# Altium PCB lm3886 Audio Amplifier.PcbDoc
Units mil, origin at the board's own origin, x right, y up, seen from the top; angles counter-clockwise.
Board outline 4448.92 x 2595 mil, 2 copper layers (Top Layer, Bottom Layer); 125 components, 45 nets, 248 pads, 0 vias.
Unrouted connection lines stored in the file: 157.
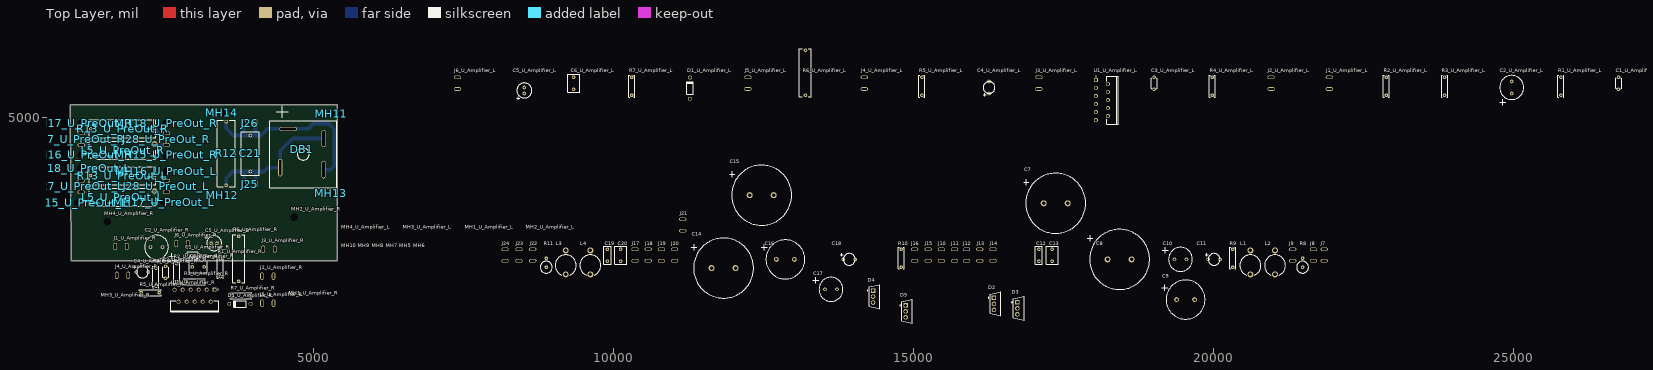
[diagram p0: Top Layer view]
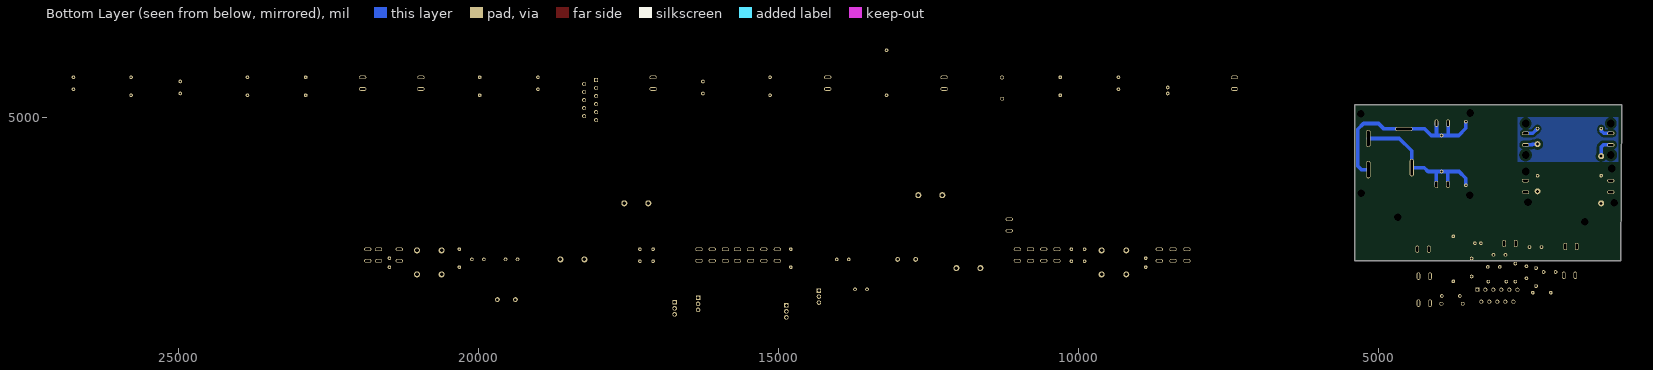
[diagram p1: Bottom Layer view, seen from below]

## Layer stack, top to bottom
Top Solder: solder mask 0.4, Solder Resist, Dk 3.5
Top Layer: signal copper 1.4
Dielectric 1: dielectric 12.6, FR-4, Dk 4.8
Bottom Layer: signal copper 1.4
Bottom Solder: solder mask 0.4, Solder Resist, Dk 3.5

## Board outline
946.08,5210 5395,5210 5395,2615 962.5,2615

## Design rules (kind name [scope] priority, off if disabled: settings)
Clearance [All] p1: gap=40 ignorepadtopadclearanceinfootprint=FALSE except(20: THPad-THPad THPad-Hole)
Height [All] p1: minheight=0 maxheight=10000 prefheight=500
PolygonConnect [All] p1: connectstyle=Relief reliefconductorwidth=10 reliefentries=4 polygonreliefangle="90 Angle" airgapwidth=10
RoutingVias [All] p1: holewidth=28 width=50 viastyle="Through Hole" minholewidth=28 minwidth=50 maxholewidth=28 maxwidth=50
SolderMaskExpansion [All] p1: expansion=4 istentingtop=FALSE
Width [All] p1: maxlimit=100 minlimit=10 preferedwidth=10
29 further rules are at their usual default settings.

## Classes and differential pairs
channel class PreOut: U_PreOut_L U_PreOut_R
channel class Amplifier: U_Amplifier_L U_Amplifier_R
component class U_Supply: C7 C8 C9 C10 C11 C12 C13 C14 C15 C16 C17 C18 C19 C20 D2 D3 D4 D5 J7 J8 J9 J10 J11 J12 J13 J14 J15 J16 J17 J18 J19 J20 J21 J22 J23 J24 L1 L2 L3 L4 MH5 MH6 MH7 MH8 MH9 MH10 R8 R9 R10 R11
component class U_PreOut_R: J27_U_PreOut_R J28_U_PreOut_R L5_U_PreOut_R MH15_U_PreOut_R MH16_U_PreOut_R MH17_U_PreOut_R MH18_U_PreOut_R R13_U_PreOut_R
component class U_PreOut_L: J27_U_PreOut_L J28_U_PreOut_L L5_U_PreOut_L MH15_U_PreOut_L MH17_U_PreOut_L MH18_U_PreOut_L R13_U_PreOut_L
component class "U_GND Loop": C21 DB1 J25 J26 MH11 MH12 MH14 R12
component class U_Amplifier_R: C1_U_Amplifier_R C2_U_Amplifier_R C3_U_Amplifier_R C4_U_Amplifier_R C5_U_Amplifier_R C6_U_Amplifier_R D1_U_Amplifier_R J1_U_Amplifier_R J2_U_Amplifier_R J3_U_Amplifier_R J4_U_Amplifier_R J5_U_Amplifier_R J6_U_Amplifier_R MH1_U_Amplifier_R MH2_U_Amplifier_R MH3_U_Amplifier_R MH4_U_Amplifier_R R1_U_Amplifier_R R2_U_Amplifier_R R3_U_Amplifier_R R4_U_Amplifier_R R5_U_Amplifier_R R6_U_Amplifier_R R7_U_Amplifier_R U1_U_Amplifier_R
component class U_Amplifier_L: C1_U_Amplifier_L C2_U_Amplifier_L C3_U_Amplifier_L C4_U_Amplifier_L C5_U_Amplifier_L C6_U_Amplifier_L D1_U_Amplifier_L J1_U_Amplifier_L J2_U_Amplifier_L J3_U_Amplifier_L J4_U_Amplifier_L J5_U_Amplifier_L J6_U_Amplifier_L MH1_U_Amplifier_L MH2_U_Amplifier_L MH3_U_Amplifier_L MH4_U_Amplifier_L R1_U_Amplifier_L R2_U_Amplifier_L R3_U_Amplifier_L R4_U_Amplifier_L R5_U_Amplifier_L R6_U_Amplifier_L R7_U_Amplifier_L U1_U_Amplifier_L

## Components (designator, comment, footprint, x,y, rotation, side; value= is the part's Value field where it differs from the comment)
C1_U_Amplifier_L "47pF" "CAPACITOR P5 2.4X4.4MM" 26745,5470 r90 top (schematic designator C1)
C1_U_Amplifier_R "47pF" "CAPACITOR P5 2.4X4.4MM" 2880,2710 r0 top (schematic designator C1)
C2_U_Amplifier_L "470uF" "CAPACITOR ELECTROLYTIC 10X16MM" 24965,5400 r90 top (schematic designator C2)
C2_U_Amplifier_R "470uF" "CAPACITOR ELECTROLYTIC 10X16MM" 2480,2840 r180 top (schematic designator C2)
C3_U_Amplifier_L "680pF" "CAPACITOR P5 2.4X4.4MM" 19005,5470 r90 top (schematic designator C3)
C3_U_Amplifier_R "680pF" "CAPACITOR P5 2.4X4.4MM" 2530,2320 r90 top (schematic designator C3)
C4_U_Amplifier_L "4.7uF" "CAPACITOR ELECTROLYTIC 5X11MM" 16255,5400 r90 top (schematic designator C4)
C4_U_Amplifier_R "4.7uF" "CAPACITOR ELECTROLYTIC 5X11MM" 2045,2425 r0 top (schematic designator C4)
C5_U_Amplifier_L "100uF" "CAPACITOR ELECTROLYTIC 6X11MM" 8510,5400 r90 top (schematic designator C5)
C5_U_Amplifier_R "100uF" "CAPACITOR ELECTROLYTIC 6X11MM" 3290,2905 r0 top (schematic designator C5)
C6_U_Amplifier_L "220nF" "CAPACITOR P5 5X7.5MM" 9330,5470 r90 top (schematic designator C6)
C6_U_Amplifier_R "220nF" "CAPACITOR P5 5X7.5MM" 2975,2510 r0 top (schematic designator C6)
C7 "4700uF" "CAPACITOR ELECTROLYTIC 25X41MM" 17165,3570 r0 top
C8 "4700uF" "CAPACITOR ELECTROLYTIC 25X41MM" 18230,2635 r0 top
C9 "3300uF" "CAPACITOR ELECTROLYTIC 16X21MM" 19380,1965 r0 top
C10 "470uF" "CAPACITOR ELECTROLYTIC 10X16MM" 19345,2635 r0 top
C11 "22uF" "CAPACITOR ELECTROLYTIC 5X11MM" 19905,2635 r0 top
C12 "100nF" "CAPACITOR P5 3X7.5MM" 17085,2605 r90 top
C13 "100nF" "CAPACITOR P5 5X7.5MM" 17305,2605 r90 top
C14 "4700uF" "CAPACITOR ELECTROLYTIC 25X41MM" 11630,2490 r0 top
C15 "4700uF" "CAPACITOR ELECTROLYTIC 25X41MM" 12265,3705 r0 top
C16 "3300uF" "CAPACITOR ELECTROLYTIC 16X21MM" 12710,2635 r0 top
C17 "470uF" "CAPACITOR ELECTROLYTIC 10X16MM" 13520,2135 r0 top
C18 "22uF" "CAPACITOR ELECTROLYTIC 5X11MM" 13825,2635 r0 top
C19 "100nF" "CAPACITOR P5 3X7.5MM" 9895,2605 r90 top
C20 "100nF" "CAPACITOR P5 5X7.5MM" 10115,2605 r90 top
C21 "100nF" "CAPACITOR P15 7.2X18.3MM" 3945,4100 r90 top
D1_U_Amplifier_L "1N4745A" FAIR-DO-41-2_V 11270,5490 r90 top (schematic designator D1)
D1_U_Amplifier_R "1N4745A" FAIR-DO-41-2_V 3770,1895 r180 top (schematic designator D1)
D2 "MBR20100CT-E3/4W" FP-MBR20100CT-E3-4W-MFG 16360,1895 r0 top
D3 "MBR20100CT-E3/4W" FP-MBR20100CT-E3-4W-MFG 16750,1820 r0 top
D4 "MBR20100CT-E3/4W" FP-MBR20100CT-E3-4W-MFG 14345,2015 r0 top
D5 "MBR20100CT-E3/4W" FP-MBR20100CT-E3-4W-MFG 14889.02,1769.61 r0 top
DB1 "Diode Rectifier" "KBPC RECTIFIER" 4825,4390 r0 top
J1_U_Amplifier_L "GND_SIG" "TERMINAL 6.3MM MALE" 21925,5475 r90 top (schematic designator J1)
J1_U_Amplifier_R "GND_SIG" "TERMINAL 6.3MM MALE" 1885,2850 r180 top (schematic designator J1)
J2_U_Amplifier_L "V+" "TERMINAL 6.3MM MALE" 20955,5475 r90 top (schematic designator J2)
J2_U_Amplifier_R "V+" "TERMINAL 6.3MM MALE" 4330,2355 r180 top (schematic designator J2)
J3_U_Amplifier_L "V+" "TERMINAL 6.3MM MALE" 17085,5475 r90 top (schematic designator J3)
J3_U_Amplifier_R "V+" "TERMINAL 6.3MM MALE" 4350,2805 r180 top (schematic designator J3)
J4_U_Amplifier_L "Input" "TERMINAL 6.3MM MALE" 14175,5475 r90 top (schematic designator J4)
J4_U_Amplifier_R "Input" "TERMINAL 6.3MM MALE" 1907.91,2370 r180 top (schematic designator J4)
J5_U_Amplifier_L "V-" "TERMINAL 6.3MM MALE" 12235,5475 r90 top (schematic designator J5)
J5_U_Amplifier_R "V-" "TERMINAL 6.3MM MALE" 4137.09,1905 r0 top (schematic designator J5)
J6_U_Amplifier_L "GND_PWR" "TERMINAL 6.3MM MALE" 7395,5475 r90 top (schematic designator J6)
J6_U_Amplifier_R "GND_PWR" "TERMINAL 6.3MM MALE" 2902.91,2900 r180 top (schematic designator J6)
J7 "V+" "TERMINAL 6.3MM MALE" 21840,2610 r90 top
J8 "V+" "TERMINAL 6.3MM MALE" 21660,2610 r90 top
J9 "6.3mm Male Terminal" "TERMINAL 6.3MM MALE" 21315,2610 r90 top
J10 "GND" "TERMINAL 6.3MM MALE" 15460,2610 r90 top
J11 "GND" "TERMINAL 6.3MM MALE" 15680,2610 r90 top
J12 "GND" "TERMINAL 6.3MM MALE" 15880,2610 r90 top
J13 "GND" "TERMINAL 6.3MM MALE" 16100,2610 r90 top
J14 "GND" "TERMINAL 6.3MM MALE" 16320,2610 r90 top
J15 "GND" "TERMINAL 6.3MM MALE" 15240,2610 r90 top
J16 "GND" "TERMINAL 6.3MM MALE" 15015,2610 r90 top
J17 "GND" "TERMINAL 6.3MM MALE" 10355,2610 r90 top
J18 "GND" "TERMINAL 6.3MM MALE" 10575,2610 r90 top
J19 "GND" "TERMINAL 6.3MM MALE" 10795,2610 r90 top
J20 "GND" "TERMINAL 6.3MM MALE" 11015,2610 r90 top
J21 "GND" "TERMINAL 6.3MM MALE" 11150,3112.09 r90 top
J22 "6.3mm Male Terminal" "TERMINAL 6.3MM MALE" 8650,2610 r90 top
J23 "V-" "TERMINAL 6.3MM MALE" 8420,2610 r90 top
J24 "V-" "TERMINAL 6.3MM MALE" 8190,2610 r90 top
J25 "Earth" "TERMINAL 6.3MM MALE" 4032.91,3885 r180 top
J26 "GND" "TERMINAL 6.3MM MALE" 4030,4905 r180 top
J27_U_PreOut_L "OUT" "TERMINAL 6.3MM MALE" 1125,3755 r90 top (schematic designator J27)
J27_U_PreOut_R "OUT" "TERMINAL 6.3MM MALE" 1125,4542.09 r90 top (schematic designator J27)
J28_U_PreOut_L "IN" "TERMINAL 6.3MM MALE" 2545,3755 r90 top (schematic designator J28)
J28_U_PreOut_R "IN" "TERMINAL 6.3MM MALE" 2545,4542.09 r90 top (schematic designator J28)
L1 "Inductor P10" "INDUCTOR P10" 20610,2385 r90 top
L2 "Inductor P9" "INDUCTOR P10" 21020,2385 r90 top
L3 "Inductor P10" "INDUCTOR P10" 9200,2385 r90 top
L4 "Inductor P9" "INDUCTOR P10" 9610,2385 r90 top
L5_U_PreOut_L "Inductor" "INDUCTOR P26" 2345.63,3670 r180 top (schematic designator L5)
L5_U_PreOut_R "Inductor" "INDUCTOR P26" 2345.63,4455 r180 top (schematic designator L5)
MH1_U_Amplifier_L "Mounting Hole m3" "Mounting Hole" 7570,3035 r90 top (schematic designator MH1)
MH1_U_Amplifier_R "Mounting Hole m3" "Mounting Hole" 4640,1935 r90 top (schematic designator MH1)
MH2_U_Amplifier_L "Mounting Hole m3" "Mounting Hole" 8590,3035 r90 top (schematic designator MH2)
MH2_U_Amplifier_R "Mounting Hole m3" "Mounting Hole" 4675,3335 r90 top (schematic designator MH2)
MH3_U_Amplifier_L "Mounting Hole m3" "Mounting Hole" 6540,3035 r90 top (schematic designator MH3)
MH3_U_Amplifier_R "Mounting Hole m3" "Mounting Hole" 1505,1900 r90 top (schematic designator MH3)
MH4_U_Amplifier_L "Mounting Hole m3" "Mounting Hole" 5510,3035 r90 top (schematic designator MH4)
MH4_U_Amplifier_R "Mounting Hole m3" "Mounting Hole" 1560,3260 r90 top (schematic designator MH4)
MH5 "Mounting Hole m3" "Mounting Hole" 6480,2745 r0 top
MH6 "Mounting Hole m3" "Mounting Hole" 6715,2745 r0 top
MH7 "Mounting Hole m3" "Mounting Hole" 6250,2745 r0 top
MH8 "Mounting Hole m3" "Mounting Hole" 6020,2745 r0 top
MH9 "Mounting Hole m3" "Mounting Hole" 5790,2745 r0 top
MH10 "Mounting Hole m3" "Mounting Hole" 5510,2745 r90 top
MH11 "Mounting Hole m3" "MOUNTING HOLE" 5290,5060 r0 top
MH12 "Mounting Hole m3" "MOUNTING HOLE" 3475,3705 r0 top
MH13 "Mounting Hole m3" "MOUNTING HOLE" 5285,3735 r0 top
MH14 "Mounting Hole m3" "MOUNTING HOLE" 3465,5075 r0 top
MH15_U_PreOut_L "Mounting Hole m3" "MOUNTING HOLE" 1070,3580 r90 top (schematic designator MH15)
MH15_U_PreOut_R "Mounting Hole m3" "MOUNTING HOLE" 2545,4375 r90 top (schematic designator MH15)
MH16_U_PreOut_L "Mounting Hole m3" "MOUNTING HOLE" 2540,4100 r90 top (schematic designator MH16)
MH16_U_PreOut_R "Mounting Hole m3" "MOUNTING HOLE" 1125,4375 r90 top (schematic designator MH16)
MH17_U_PreOut_L "Mounting Hole m3" "MOUNTING HOLE" 2505,3585 r90 top (schematic designator MH17)
MH17_U_PreOut_R "Mounting Hole m3" "MOUNTING HOLE" 1125,4900 r90 top (schematic designator MH17)
MH18_U_PreOut_L "Mounting Hole m3" "MOUNTING HOLE" 1110,4150 r90 top (schematic designator MH18)
MH18_U_PreOut_R "Mounting Hole m3" "MOUNTING HOLE" 2545,4900 r90 top (schematic designator MH18)
R1_U_Amplifier_L "20k" "RESISTOR 0207 1/4W" 25785,5370 r90 top (schematic designator R1)
R1_U_Amplifier_R "20k" "RESISTOR 0207 1/4W" 3445,2650 r270 top (schematic designator R1)
R2_U_Amplifier_L "1k" "RESISTOR 0207 1/4W" 22875,5370 r90 top (schematic designator R2)
R2_U_Amplifier_R "1k" "RESISTOR 0207 1/4W" 2715,2565 r270 top (schematic designator R2)
R3_U_Amplifier_L "20k" "RESISTOR 0207 1/4W" 23845,5370 r90 top (schematic designator R3)
R3_U_Amplifier_R "20k" "RESISTOR 0207 1/4W" 2865,2265 r0 top (schematic designator R3)
R4_U_Amplifier_L "20k" "RESISTOR 0207 1/4W" 19975,5370 r90 top (schematic designator R4)
R4_U_Amplifier_R "20k" "RESISTOR 0207 1/4W" 2370,2190 r90 top (schematic designator R4)
R5_U_Amplifier_L "1k" "RESISTOR 0207 1/4W" 15135,5370 r90 top (schematic designator R5)
R5_U_Amplifier_R "1k" "RESISTOR 0207 1/4W" 2125,2080 r0 top (schematic designator R5)
R6_U_Amplifier_L "4R7" "RESISTOR 0617 2W" 13195,5370 r90 top (schematic designator R6)
R6_U_Amplifier_R "4R7" "RESISTOR 0617 2W" 3750,2270 r90 top (schematic designator R6)
R7_U_Amplifier_L "10k" "RESISTOR 0207 1/4W" 10300,5370 r90 top (schematic designator R7)
R7_U_Amplifier_R "10k" "RESISTOR 0207 1/4W" 3640,2025 r0 top (schematic designator R7)
R8 "Resistor" "RESISTOR 0617 2W VERTICAL" 21480,2505 r90 top
R9 "1M" "RESISTOR 0207 1/4W" 20315,2505 r90 top
R10 "1M" "RESISTOR 0207 1/4W" 14790,2505 r90 top
R11 "Resistor" "RESISTOR 0617 2W VERTICAL" 8875,2505 r90 top
R12 "10R" "RESISTOR 0823 5W" 3540,3870 r90 top
R13_U_PreOut_L "Resistor" "RESISTOR 0823 5W" 2345.63,4030 r180 top (schematic designator R13)
R13_U_PreOut_R "Resistor" "RESISTOR 0823 5W" 2345.63,4815 r180 top (schematic designator R13)
U1_U_Amplifier_L "LM3886T/NOPB" TI-NDJ11 18135,5290 r0 top (schematic designator U1)
U1_U_Amplifier_R "LM3886T/NOPB" TI-NDJ11 3015,2030 r270 top (schematic designator U1)

## Footprints (in the part's own frame and the unit in brackets; to place one, negate y for a bottom-side part, rotate by r counter-clockwise, add the part's x,y. Pads: shape width x height; smd on the part's side, far side on the other; paste and mask are expansions set on the pad)
"CAPACITOR ELECTROLYTIC 5X11MM" [mil]
  round 60 hole 30: 1(0,0) 2(200,0)
  silkscreen extent -50,-98 198,100, body extent -10,-98 210,98, height 533
"CAPACITOR ELECTROLYTIC 6X11MM" [mil]
  round 60 hole 30: 1(0,0) 2(100,0)
  silkscreen extent -105,-125 175,125, body extent -75,-125 175,125, height 433
"CAPACITOR ELECTROLYTIC 10X16MM" [mil]
  round 60 hole 30: 1(0,0) 2(200,0)
  silkscreen extent -200,-200 300,200, body extent -100,-200 300,200, height 650
"CAPACITOR ELECTROLYTIC 16X21MM" [mil]
  round 80 hole 40: 1(0,0) 2(300,0)
  silkscreen extent -250,-325 475,325, body extent -175,-325 475,325, height 850
"CAPACITOR ELECTROLYTIC 25X41MM" [mil]
  round 100 hole 60: 1(0,0) 2(400,0)
  silkscreen extent -335,-500 700,500, body extent -300,-500 700,500, height 1600
"CAPACITOR P5 2.4X4.4MM" [mil]
  round 60 hole 30: 1(0,0) 2(200,0)
  silkscreen extent 10,-50 190,50
"CAPACITOR P5 3X7.5MM" [mil]
  round 60 hole 30: 1(0,0) 2(200,0)
  silkscreen extent -50,-60 250,60
"CAPACITOR P5 5X7.5MM" [mil]
  round 60 hole 30: 1(0,0) 2(200,0)
  silkscreen extent -50,-100 250,100, body extent -50,-100 250,100, height 400
"CAPACITOR P15 7.2X18.3MM" [mil]
  round 60 hole 30: 1(0,0) 2(600,0)
  silkscreen extent -63,-150 663,150
FAIR-DO-41-2_V [mm] "2-Leads, Axial leaded, Body 2.72x5.2mm, Pin Spacing 9mm"
  round 1.65 hole 1.15: 1(-4.5,0) 2(4.5,0)
  silkscreen extent -2.6,-1.36 2.6,1.36, body extent -4.93,-1.36 4.93,1.36, height 2.71
FP-MBR20100CT-E3-4W-MFG [mm]
  rect 1.9x1.9 hole 1.25 paste-2539.97 mask+0: 1(-0.61,2.55)
  round 1.9 hole 1.25 paste-2539.97 mask+0: 2(-0.61,0) 3(-0.61,-2.55)
  silkscreen extent -3.07,-5.08 2.25,5.08, body extent -2.45,-5.37 2.45,5.37, height 0.25
"INDUCTOR P10" [mil]
  round 100 hole 60: 1(0,0) 2(400,0)
  silkscreen extent -12,-175 325,175, body extent -28,-175 428,175, height 600
"INDUCTOR P26" [mm]
  round 2.54 hole 1.27: 1(0,-2.54) 2(26.94,2.54)
  silkscreen extent -0.64,-3.81 27.57,3.81, body extent -0.25,-3.81 27.19,3.81, height 7.62
"KBPC RECTIFIER" [mil]
  oval 70x290 hole 40 slot 260 at 90 deg: 1(340.12,-259.84) 2(-383.43,-226.38) 3(340.12,259.84)
  oval 290x70 hole 40 slot 260 at 0 deg: 4(-251.97,418.86)
  silkscreen extent -559,-559 559,809, body extent -560,-560 560,560, height 437
"Mounting Hole" [mm]
  round 0 hole 3.2 unplated: ""(0,0)
"MOUNTING HOLE" [mm]
  round 0 hole 3.2 unplated: ""(0,0)
"RESISTOR 0207 1/4W" [mil]
  round 60 hole 30: 1(0,0) 2(300,0)
  silkscreen extent -30,-50 330,50, body extent -10,-50 310,50, height 100
"RESISTOR 0617 2W" [mil]
  round 60 hole 30: 1(0,0) 2(750,0)
  silkscreen extent -25,-100 775,100, body extent -10,-100 760,100, height 200
"RESISTOR 0617 2W VERTICAL" [mil]
  round 60 hole 30: 1(0,0) 2(150,0)
  silkscreen extent -100,-100 100,100, body extent -100,-100 160,100, height 718
"RESISTOR 0823 5W" [mil]
  round 60 hole 30: 1(0,0) 2(1060.63,0)
  silkscreen extent -25,-150 1086,150, body extent -10,-150 1065,150, height 300
"TERMINAL 6.3MM MALE" [mil]
  oval 60x120 hole 30 slot 90 at 90 deg: 1(0,0) 1(192.91,0)
TI-NDJ11 [mm] "FM, 11-Leads, Body 20.02x4.5mm, Pitch 1.7mm"
  rect 1.7x1.7 hole 1.1: 1(-2.54,8.5)
  round 1.7 hole 1.1: 2(2.54,6.8) 3(-2.54,5.1) 4(2.54,3.4) 5(-2.54,1.7) 6(2.54,0) 7(-2.54,-1.7) 8(2.54,-3.4) 9(-2.54,-5.1) 10(2.54,-6.8) 11(-2.54,-8.5)
  silkscreen extent -2.66,-10.15 6.86,10.15, body extent -2.75,-10.15 6.83,10.15, height 20.82

## Part data
C1_U_Amplifier_L C1_U_Amplifier_R C3_U_Amplifier_L C3_U_Amplifier_R C6_U_Amplifier_L C6_U_Amplifier_R C12 C13 C19 C20 C21: library part Capacitor
C2_U_Amplifier_L C2_U_Amplifier_R C4_U_Amplifier_L C4_U_Amplifier_R C5_U_Amplifier_L C5_U_Amplifier_R C7 C8 C9 C10 C11 C14 C15 C16 C17 C18: library part "Capacitor Polar"
D1_U_Amplifier_L D1_U_Amplifier_R: library part CMP-0892-00004-1, "Zener Diode, 16V, 1W, 5%, -65 to 200 degC, 2-Pin DO-41, Body 2.72 x 5.2 mm, RoHS", Manufacturer="Fairchild Semiconductor", Operating and Storage Temperature Range="-65 to 200 degC", Test Current IZ (mA)=15.5, Tolerance=5%, ComponentLink1Description="Manufacturer URL", ComponentLink1URL=http://www.fairchildsemi.com/, ComponentLink2Description=Datasheet, ComponentLink2URL=http://www.fairchildsemi.com/ds/1N/1N4744A.pdf, ComponentLink3Description="Package Specification", ComponentLink3URL=http://www.fairchildsemi.com/dwg/DO/DO41A.pdf, DatasheetVersion="Rev. H3", IR (uA)=5, Mounting Technology="Through Hole", PackageDescription="2-Pin Axial leaded, Body 2.72 x 5.2 mm, Lead Spread 25.4 mm", PackageReference=DO-41-2, PackageVersion="Rev. 2", PartNumber=1N4745A, PD (W)=1, RoHS=TRUE, VZ (Max.) (V)=16.8, VZ (Min.) (V)=15.2, ZZ (Max) (ohm)=14
D2 D3 D4 D5: library part CMP-00030-42878425-1, "MBR20100CT-E3/4W Dual Common-Cathode High-Voltage Schottky Rectifier", Average Rectified Current=10A, Case/Package=TO-220AB, Forward Current=20A, Forward Voltage=800mV, Max Forward Surge Current (Ifsm)=150A, Max Junction Temperature (Tj)=150°C, Max Repetitive Reverse Voltage (Vrrm)=100V, Max Reverse Leakage Current=100µA, Min Operating Temperature=-65°C, Element Configuration="Common Cathode", Height=15.3162mm, Lead Free="Lead Free", Length=10.5156mm, Max Operating Temperature=150°C, Max Reverse Voltage (DC)=100V, Max Surge Current=150A, Mount="Through Hole", NexarPartId=42878425, Number of Pins=3, Peak Non-Repetitive Surge Current=150A, Peak Reverse Current=100µA, Radiation Hardening=No, Reverse Voltage=100V, RoHS=Compliant, Schedule B="8541100080, 8541100080", Width=4.699mm
J1_U_Amplifier_L J1_U_Amplifier_R J2_U_Amplifier_L J2_U_Amplifier_R J3_U_Amplifier_L J3_U_Amplifier_R J4_U_Amplifier_L J4_U_Amplifier_R J5_U_Amplifier_L J5_U_Amplifier_R J6_U_Amplifier_L J6_U_Amplifier_R J7 J8 J10 J11 J12 J13 J14 J15 J16 J17 J18 J19 J20 J21 J23 J24 J25 J26 J27_U_PreOut_L J27_U_PreOut_R J28_U_PreOut_L J28_U_PreOut_R: library part "6.3mm Male Terminal"
L1 L2 L3 L4: library part Inductor
R1_U_Amplifier_L R1_U_Amplifier_R R2_U_Amplifier_L R2_U_Amplifier_R R3_U_Amplifier_L R3_U_Amplifier_R R4_U_Amplifier_L R4_U_Amplifier_R R5_U_Amplifier_L R5_U_Amplifier_R R6_U_Amplifier_L R6_U_Amplifier_R R7_U_Amplifier_L R7_U_Amplifier_R R9 R10 R12: library part Resistor
U1_U_Amplifier_L U1_U_Amplifier_R: library part CMP-0994-00122-1, "High-Performance 68 W Audio Power Amplifier with Mute, 0 to 70 degC, 11-pin FM (NDJ11), Green (RoHS & no Sb/Br)", Manufacturer="Texas Instruments", ComponentLink1Description="Manufacturer URL", ComponentLink1URL=http://www.ti.com/, ComponentLink2Description=Datasheet, ComponentLink2URL=http://www.ti.com/general/docs/lit/getliterature.tsp?genericPartNumber=LM3886&fileType=pdf, ComponentLink3Description="Package Specification", ComponentLink3URL=http://www.ti.com/lit/ds/symlink/lm3886.pdf, DatasheetVersion=SNAS091C, Eco-Plan="Green (RoHS & no Sb/Br)", Input Type=Analog, Mounting Technology="Through Hole", PackageDescription="11-Pin Metal Flange Mount, Body 20.02 x 4.5, Pitch 1.7 mm", PackageReference=NDJ11, PackageVersion="Rev. B, 05/2013", PartNumber=LM3886T/NOPB, SubFamily="Mid/High-Power Amplifier"

## Nets (pads, with @x,y where several pads share a name; then routed paths per layer and width w, separated by ;. In a path a pad name is that pad's centre, name@x,y a point inside that pad or via, vN(x,y) a via of type N, cw(c..) or ccw(c..) an arc to the next point about the centre after c; other vN are vias at no path point)
GND: C7.2 C8.2 C9.2 C10.2 C11.2 C12.1 C13.1 C14.1 C15.1 C16.1 C17.1 C18.1 C19.2 C20.2 J10.1 J11.1 J12.1 J13.1 J14.1 J15.1 J16.1 J17.1 J18.1 J19.1 J20.1 J21.1 R9.1 R10.2
NetC1_U_Amplifier_L_1: C1_U_Amplifier_L.1 R2_U_Amplifier_L.2 R3_U_Amplifier_L.1 U1_U_Amplifier_L.9
NetC1_U_Amplifier_L_2: C1_U_Amplifier_L.2 R1_U_Amplifier_L.1
NetC1_U_Amplifier_R_1: C1_U_Amplifier_R.1 R2_U_Amplifier_R.2 R3_U_Amplifier_R.1 U1_U_Amplifier_R.9
NetC1_U_Amplifier_R_2: C1_U_Amplifier_R.2 R1_U_Amplifier_R.1
NetC2_U_Amplifier_L_1: C2_U_Amplifier_L.1 R2_U_Amplifier_L.1
NetC2_U_Amplifier_L_2: C2_U_Amplifier_L.2 C3_U_Amplifier_L.2 J1_U_Amplifier_L.1 R4_U_Amplifier_L.2
NetC2_U_Amplifier_R_1: C2_U_Amplifier_R.1 R2_U_Amplifier_R.1
NetC2_U_Amplifier_R_2: C2_U_Amplifier_R.2 C3_U_Amplifier_R.2 J1_U_Amplifier_R.1 R4_U_Amplifier_R.2
NetC3_U_Amplifier_L_1: C3_U_Amplifier_L.1 R5_U_Amplifier_L.2 U1_U_Amplifier_L.10
NetC3_U_Amplifier_R_1: C3_U_Amplifier_R.1 R5_U_Amplifier_R.2 U1_U_Amplifier_R.10
NetC4_U_Amplifier_L_1: C4_U_Amplifier_L.1 J4_U_Amplifier_L.1
NetC4_U_Amplifier_L_2: C4_U_Amplifier_L.2 R4_U_Amplifier_L.1 R5_U_Amplifier_L.1
NetC4_U_Amplifier_R_1: C4_U_Amplifier_R.1 J4_U_Amplifier_R.1
NetC4_U_Amplifier_R_2: C4_U_Amplifier_R.2 R4_U_Amplifier_R.1 R5_U_Amplifier_R.1
NetC5_U_Amplifier_L_1: C5_U_Amplifier_L.1 C6_U_Amplifier_L.1 J6_U_Amplifier_L.1 U1_U_Amplifier_L.7
NetC5_U_Amplifier_L_2: C5_U_Amplifier_L.2 D1_U_Amplifier_L.1 R7_U_Amplifier_L.2
NetC5_U_Amplifier_R_1: C5_U_Amplifier_R.1 C6_U_Amplifier_R.1 J6_U_Amplifier_R.1 U1_U_Amplifier_R.7
NetC5_U_Amplifier_R_2: C5_U_Amplifier_R.2 D1_U_Amplifier_R.1 R7_U_Amplifier_R.2
NetC6_U_Amplifier_L_2: C6_U_Amplifier_L.2 R6_U_Amplifier_L.2
NetC6_U_Amplifier_R_2: C6_U_Amplifier_R.2 R6_U_Amplifier_R.2
NetC7_1: C7.1 C8.1 D2.2 D3.2 L1.1 R9.2
NetC9_1: C9.1 C10.1 C11.1 L1.2 L2.1
NetC12_2: C12.2 J7.1 J8.1 L2.2 R8.2
NetC13_2: C13.2 R8.1
NetC14_2: C14.2 C15.2 D4.1 D4.3 D5.1 D5.3 L3.1 R10.1
NetC16_2: C16.2 C17.2 C18.2 L3.2 L4.1
NetC19_1: C19.1 J23.1 J24.1 L4.2 R11.2
NetC20_1: C20.1 R11.1
NetC21_1: C21.1 DB1.2 DB1.3 J25.1 R12.1 | length 2610.3
  Bottom Layer w10: 4032.91,4097.91 4035,4100
  Bottom Layer w60: R12.1 3540,3985 3655,4100 3840,4100 ; J25.1@3840,3885 3840,4100 ; J25.1@4032.91,3885 4032.91,4097.91 ; DB1.3 4647.99,4649.84 4441.57,4443.43 DB1.2 4233.62,4163.62 4170,4100 4035,4100 C21.1 3840,4100
NetC21_2: C21.2 DB1.1 DB1.4 J26.1 R12.2 | length 3308.4
  Bottom Layer w60: R12.2 3540,4820 3660,4700 3840,4700 ; J26.1@3837.09,4905 3837.09,4702.91 3840,4700 ; J26.1@4030,4905 4030,4700 ; DB1.1 5280.16,4130.16 5340,4190 5340,4805 5245,4900 4995,4900 4903.86,4808.86 DB1.4 4223.86,4808.86 4115,4700 4030,4700 ; 3840,4700 C21.2 4030,4700
NetD1_U_Amplifier_L_2: D1_U_Amplifier_L.2 U1_U_Amplifier_L.8
NetD1_U_Amplifier_R_2: D1_U_Amplifier_R.2 U1_U_Amplifier_R.8
NetD2_1: D2.1 D2.3 D4.2 J22.1
NetD3_1: D3.1 D3.3 D5.2 J9.1
NetJ2_U_Amplifier_L_1: J2_U_Amplifier_L.1 U1_U_Amplifier_L.1 U1_U_Amplifier_L.5
NetJ2_U_Amplifier_R_1: J2_U_Amplifier_R.1 U1_U_Amplifier_R.1 U1_U_Amplifier_R.5
NetJ3_U_Amplifier_L_1: J3_U_Amplifier_L.1 R1_U_Amplifier_L.2 R3_U_Amplifier_L.2 R6_U_Amplifier_L.1 U1_U_Amplifier_L.3
NetJ3_U_Amplifier_R_1: J3_U_Amplifier_R.1 R1_U_Amplifier_R.2 R3_U_Amplifier_R.2 R6_U_Amplifier_R.1 U1_U_Amplifier_R.3
NetJ5_U_Amplifier_L_1: J5_U_Amplifier_L.1 R7_U_Amplifier_L.1 U1_U_Amplifier_L.4
NetJ5_U_Amplifier_R_1: J5_U_Amplifier_R.1 R7_U_Amplifier_R.1 U1_U_Amplifier_R.4
NetJ27_U_PreOut_L_1: J27_U_PreOut_L.1 L5_U_PreOut_L.2 R13_U_PreOut_L.2
NetJ27_U_PreOut_R_1: J27_U_PreOut_R.1 L5_U_PreOut_R.2 R13_U_PreOut_R.2 | length 544.4
  Bottom Layer w60: J27_U_PreOut_R.1@1125,4542.09 1252.09,4542.09 1285,4509.17 L5_U_PreOut_R.2 ; J27_U_PreOut_R.1@1125,4735 1245,4735 1285,4775 R13_U_PreOut_R.2
NetJ28_U_PreOut_L_1: J28_U_PreOut_L.1 L5_U_PreOut_L.1 R13_U_PreOut_L.1
NetJ28_U_PreOut_R_1: J28_U_PreOut_R.1 L5_U_PreOut_R.1 R13_U_PreOut_R.1 | length 437.2
  Bottom Layer w60: L5_U_PreOut_R.1 2430,4555 2442.91,4542.09 J28_U_PreOut_R.1@2545,4542.09 ; R13_U_PreOut_R.1 2425.63,4735 J28_U_PreOut_R.1@2545,4735
pads on no net: MH1_U_Amplifier_L. MH1_U_Amplifier_R. MH2_U_Amplifier_L. MH2_U_Amplifier_R. MH3_U_Amplifier_L. MH3_U_Amplifier_R. MH4_U_Amplifier_L. MH4_U_Amplifier_R. MH5. MH6. MH7. MH8. MH9. MH10. MH11. MH12. MH13. MH14. MH15_U_PreOut_L. MH15_U_PreOut_R. MH16_U_PreOut_L. MH16_U_PreOut_R. MH17_U_PreOut_L. MH17_U_PreOut_R. MH18_U_PreOut_L. MH18_U_PreOut_R. U1_U_Amplifier_L.2 U1_U_Amplifier_L.6 U1_U_Amplifier_L.11 U1_U_Amplifier_R.2 U1_U_Amplifier_R.6 U1_U_Amplifier_R.11

## Polygon pours and split planes (outlines as drawn)
no net on Bottom Layer "NONET_L02_P000" (solid, pour order 0): 1000,5000 2675,5000 2675,4260 1000,4260